# Altium PCB honda_nidec_giraffe20_inverted.pcbdoc
Units mil, origin at the board's own origin, x right, y up, seen from the top; angles counter-clockwise.
Board outline 4959.99 x 2260 mil, 2 copper layers (Top Layer, Bottom Layer); 6 components, 21 nets, 86 pads, 44 vias.
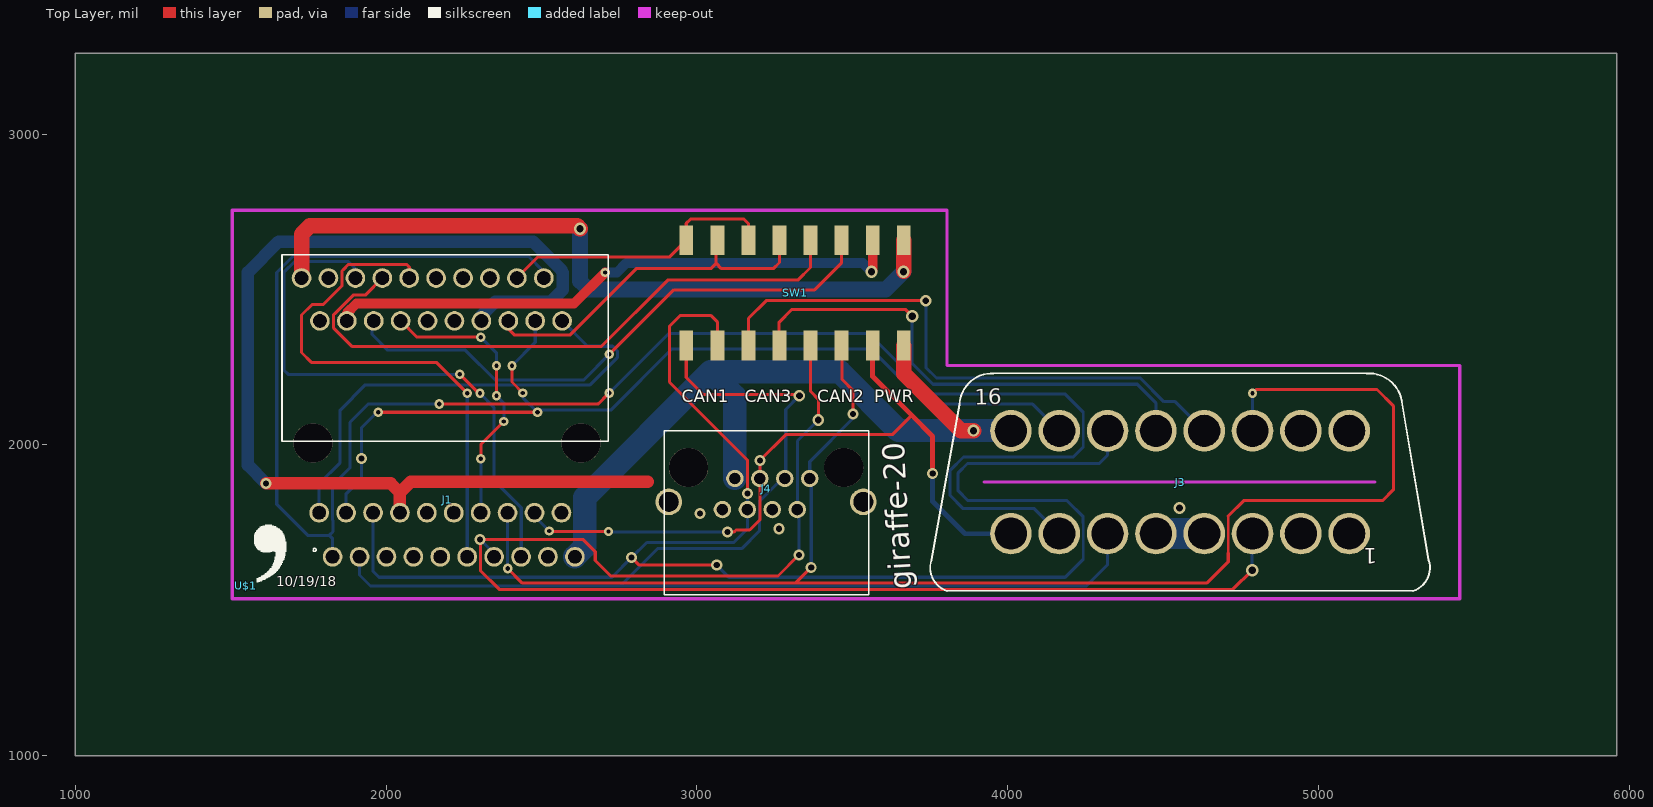
[diagram p0: Top Layer view]
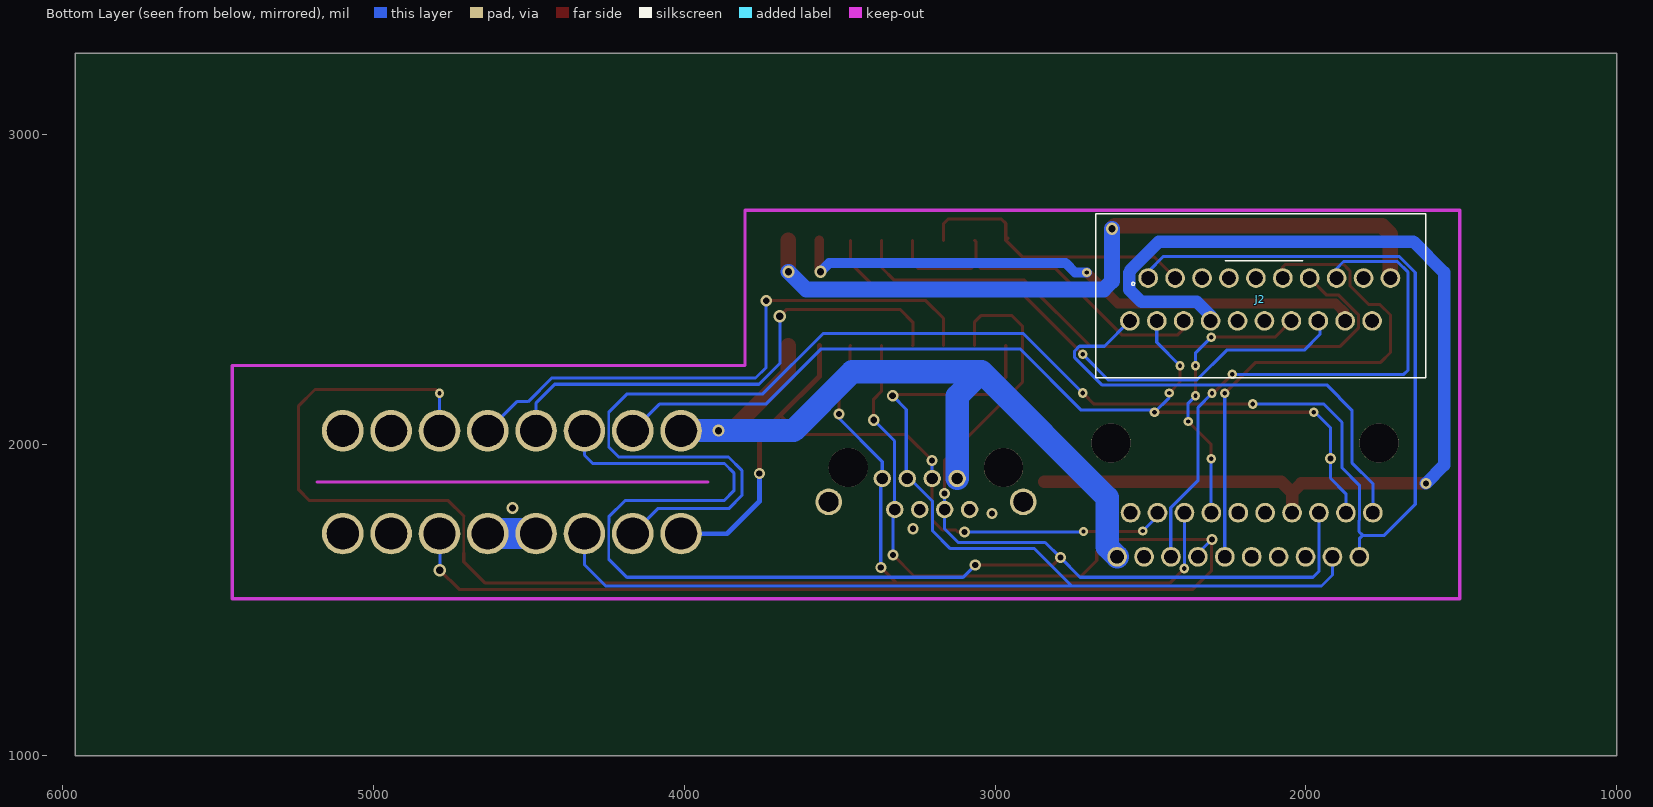
[diagram p1: Bottom Layer view, seen from below]

## Layer stack, top to bottom
Top Layer: signal copper (thickness not stored)
Dielectric: dielectric 12.6, FR-4, Dk 4.8
Bottom Layer: signal copper (thickness not stored)

## Board outline
5959.99,1000 1000,1000 1000,3260 5959.99,3260

## Components (designator, comment, footprint, x,y, rotation, side; value= is the part's Value field where it differs from the comment)
J1 "_" 2X10(RA) 2215,1712 r180 top
J2 "_" 2X10(JAE_FEMALE) 2165,2468 r180 bottom
J3 "OBDII-FEMALE-CUT" OBDII-FEMALE-MIDCUT 4554.99,1880 r0 top
J4 "VERT_RJ45" GLX-S-88M 3226.26,1730 r0 top
SW1 "4XDPSTSMT" 4-DPST 3316.02,2489 r0 top
U$1 "_" LOGO 1549,1546 r0 top

## Footprints (in the part's own frame and the unit in brackets; to place one, negate y for a bottom-side part, rotate by r counter-clockwise, add the part's x,y. Pads: shape width x height; smd on the part's side, far side on the other; paste and mask are expansions set on the pad)
2X10(JAE_FEMALE) [mm]
  round 1.608 hole 1.1 slot 1.1 at 0 deg: 1(-8.7,1.75) 2(-6.5,1.75) 3(-4.3,1.75) 4(-2.1,1.75) 5(0.1,1.75) 6(2.3,1.75) 7(4.5,1.75) 8(6.7,1.75) 9(8.9,1.75) 10(11.1,1.75) 11(-10.2,-1.75) 12(-8,-1.75) 13(-5.8,-1.75) 14(-3.6,-1.75) 15(-1.4,-1.75) 16(0.8,-1.75) 17(3,-1.75) 18(5.2,-1.75) 19(7.4,-1.75) 20(9.6,-1.75)
  silkscreen extent -13,-6.4 14,7
2X10(RA) [mm]
  round 1.608 hole 1.1 slot 1.1 at 0 deg: 1(9.83,1.83) 2(7.63,1.83) 3(5.43,1.83) 4(3.23,1.83) 5(1.03,1.83) 6(-1.17,1.83) 7(-3.37,1.83) 8(-5.57,1.83) 9(-7.77,1.83) 10(-9.97,1.83) 11(10.93,-1.77) 12(8.73,-1.77) 13(6.53,-1.77) 14(4.33,-1.77) 15(2.13,-1.77) 16(-0.07,-1.77) 17(-2.27,-1.77) 18(-4.47,-1.77) 19(-6.67,-1.77) 20(-8.87,-1.77)
  round 3.2 hole 3.2 unplated: ""(-10.47,-7.47) ""(11.43,-7.47)
  silkscreen extent -12.7,-22.86 13.97,1.4
4-DPST [mil]
  rect 44.48x96.06 smd: 1(-350,-169.29) 2(-250,-169.29) 3(-150,-169.29) 4(-50,-169.29) 5(50,-169.29) 6(150,-169.29) 7(250,-169.29) 8(350,-169.29) 9(350,169.29) 10(250,169.29) 11(150,169.29) 12(50,169.29) 13(-50,169.29) 14(-150,169.29) 15(-250,169.29) 16(-350,169.29)
GLX-S-88M [mil]
  round 56 hole 35.44 slot 35.45 at 0 deg: 1(-144.1,61.81) 2(-103.94,161.81) 3(-63.78,61.81) 4(-23.63,161.81) 5(16.53,61.81) 6(56.69,161.81) 7(96.85,61.81) 8(137,161.81)
  round 86 hole 63: S1(-316.54,86.61) S2(309.44,86.61)
  round 125.98 hole 125.98 unplated: ""(-253.55,196.85) ""(246.45,196.85)
  silkscreen extent -331,-213 327,315
LOGO [mil]
  silkscreen extent 26,12 129,196
OBDII-FEMALE-MIDCUT [mm]
  round 3.4 hole 2.6 slot 2.605 at 0 deg: 1(13.825,-4.2) 2(9.875,-4.2) 3(5.925,-4.2) 4(1.975,-4.2) 5(-1.975,-4.2) 6(-5.925,-4.2) 7(-9.875,-4.2) 8(-13.825,-4.2) 9(13.825,4.2) 10(9.875,4.2) 11(5.925,4.2) 12(1.975,4.2) 13(-1.975,4.2) 14(-5.925,4.2) 15(-9.875,4.2) 16(-13.825,4.2)
  silkscreen extent -20.42,-8.89 20.42,8.89

## Via types
v1: diameter 29.78, hole 13.78, Top Layer to Bottom Layer, 16 vias
v2: diameter 35.69, hole 19.68, Top Layer to Bottom Layer, 14 vias
v3: diameter 39.62, hole 23.62, Top Layer to Bottom Layer, 7 vias
v4: diameter 37.65, hole 21.66, Top Layer to Bottom Layer, 3 vias
v5: diameter 31.75, hole 15.74, Top Layer to Bottom Layer, 3 vias
v6: diameter 31, hole 15, Top Layer to Bottom Layer, 1 vias

## Nets (pads, with @x,y where several pads share a name; then routed paths per layer and width w, separated by ;. In a path a pad name is that pad's centre, name@x,y a point inside that pad or via, vN(x,y) a via of type N, cw(c..) or ccw(c..) an arc to the next point about the centre after c; other vN are vias at no path point)
12VIN: J1.10 J3.16 J4.2 SW1.8 | length 2587.4
  Top Layer w50: SW1.8 3666.02,2229.44 3849.46,2046 v3(3890.46,2046)
  Bottom Layer w75: J1.10 2639.36,1671.8 2639.36,1830.37 3044,2235 ; J4.2 3122.32,2156.68 3044,2235 ; J3.16 4010.06,2046 v3(3890.46,2046) 3649,2046 3460,2235 3044,2235
12VIN': J2.10 SW1.9 | length 2398.5
  Top Layer w32: v3(3665,2557) v3@3666.02,2558.02
  Top Layer w50: J2.10 1727.99,2677.99 1755,2705 2615,2705 v3(2624,2696) ; v3@3666.02,2558.02 SW1.9
  Bottom Layer w50: v3(2624,2696) 2624,2527 2651,2500 3608,2500 v3(3665,2557)
CAN1_H: J1.2 J3.6 J4.6 SW1.1 | length 4125.9
  Top Layer w10: SW1.1 2966.02,2216.97 3021,2162 3326,2162 v4(3330,2158)
  Bottom Layer w10: J1.2 1914.61,1581.39 1950,1546 2753.29,1546 ; 2949,1666 2955,1666 ; 3286,2028 3286,2022.36 ; v4(3330,2158) 3286,2114 3286,2022.36 ; J3.6 4321.99,1714.38 4321.99,1615 4252.99,1546 2753.29,1546 ; 2753.29,1546 2873.29,1666 2955,1666 ; 2955,1666 3144,1666 3201.48,1723.48 3201.48,1818.48 3274.81,1891.81 J4.6 3286,1894.86 3286,2022.36
CAN1_H': J2.2 SW1.14 SW1.16 | length 925.3
  Top Layer w10: J2.2 2489.01,2605 2912.73,2605 SW1.16 ; SW1.16@2959.31,2665 SW1.16 ; SW1.14 3166.02,2711.97 3151,2727 2980,2727 2966,2713 SW1.16
CAN1_L: J1.13 J3.14 J4.3 SW1.2 | length 5194.3
  Top Layer w10: v2(2790,1638) 2815,1613 v2(3064,1613) ; SW1.2 3066.02,2395.97 3046,2416 2946,2416 2912,2382 2912,2202 3163,1951 v2(3163,1843)
  Bottom Layer w8: 4242.99,1632 4242.99,1682.63 4243.14,1682.78 4243.14,1746.51 ; 4242.99,1746.66 4243.14,1746.51 ; 4242.99,1748.07 4243.14,1747.92 4243.14,1746.51
  Bottom Layer w10: J1.13 1957.91,1593.09 1977,1574 2727,1574 v2@2791,1638 ; v2(2790,1638) v2@2791,1638 ; v2(3064,1613) 3103,1574 4184.99,1574 4242.99,1632 ; v2(3163,1843) 3163,1792.33 J4.3 3163,1791.29 3163,1730 3119,1686 2839,1686 v2@2791,1638 ; 4242.99,1748.07 4242.99,1769 4191.34,1820.65 3905,1820.65 3900.41,1820.65 3872.35,1820.65 3841,1852 3841,1910 3871,1940 4294.87,1940 4321.73,1966.85 J3.14
CAN1_L': J2.13 SW1.13 SW1.15 | length 1164.9
  Top Layer w10: J2.13 2393.34,2373.65 2414,2353 2591,2353 2805,2567 3045,2567 3062,2584 ; SW1.15 3062,2654.27 3062,2584 ; SW1.13 3266.02,2587.02 3246,2567 3079,2567 3062,2584
CAN2_H: J1.7 J3.3 J4.7 SW1.5 | length 4665.6
  Top Layer w10: v2(3329,1646) 3261,1578 2723,1578 2673,1628 2673,1656 2633,1696 v2(2302,1696) 2304,1694 2304,1595 2364,1535 4724.99,1535 v3(4786.99,1597) ; SW1.5 3366.02,2171.98 3391,2147 v4(3391,2080)
  Bottom Layer w10: v2(2302,1696) 2347.68,1650.32 J1.7 ; v2(3329,1646) 3329,1785.92 J4.7 3324,1792.7 3324,2013 v4(3391,2080) v4@3391,2078 ; v3(4786.99,1597) 4786.99,1713.38 J3.3
CAN2_H': J2.7 SW1.12 | length 2007.9
  Top Layer w9: 1832,2375 1830.68,2376.32 1830.68,2418.86 1835.91,2424.09
  Top Layer w10: 1831.01,2419.19 1835.91,2424.09 1893.82,2482 1932.94,2482 J2.7 ; 1832,2375 1890,2317 2693,2317 2906,2530 3325,2530 3366,2571 SW1.12
CAN2_L: J1.18 J3.11 J4.8 SW1.6 | length 4989
  Top Layer w8: 4709.99,1652 4709.99,1771
  Top Layer w10: v6(2391,1602) 2437,1556 3318,1556 ; v2(3368,1606) 3318,1556 ; SW1.6 3467,2318.73 3467,2211 3502,2176 v2(3502,2099) ; 4709.99,1652 4709.99,1624 4641.99,1556 3318,1556 ; 4709.99,1771 4759.64,1820.65 5206.58,1820.65 5241.34,1855.42 5241.34,2106 5241.34,2120.35 5241.34,2125.65 5188.99,2178 4799.99,2178 v1(4787.99,2166)
  Bottom Layer w10: v6(2391,1602) J1.18 ; v2(3368,1606) 3368,1887.08 J4.8 3363.26,1946.27 3502,2085 v2(3502,2099) ; v1(4787.99,2166) 4787.99,2045.62 J3.11
CAN2_L': J2.18 SW1.11 | length 1845.8
  Top Layer w10: v1(2718.5,2291.5) 2926,2499 3379,2499 3465,2585 SW1.11
  Bottom Layer w10: J2.18 1955,2393.82 1955,2355 2005,2305 2255,2305 2351,2209 2636,2209 v1(2718.5,2291.5)
CAN3_H: J3.12 SW1.3 | length 1877.4
  Top Layer w10: SW1.3 3166,2407 3223,2464 v4(3737,2464)
  Bottom Layer w10: v4(3737,2464) 3737,2249 3771,2215 4426.99,2215 4502.99,2139 4539.1,2139 J3.12 J3.12@4632.99,2045.6
CAN3_L: J3.13 SW1.4 | length 1608.4
  Top Layer w10: SW1.4 3265,2320.73 3265,2395 3306,2436 3671,2436 v3(3693,2414)
  Bottom Layer w10: v3(3693,2414) 3693,2262 3760,2195 4417.37,2195 4476.99,2135.38 4476.99,2045.6 J3.13
GND: J1.14 J2.14 J3.4 J3.5 J4.1 J4.5 | length 3644.1
  Top Layer w40: v2(1614,1876) 2015.05,1876 2044.53,1846.53 ; J1.14 2044.53,1846.53 ; 2842,1881 2079,1881 2044.53,1846.53
  Bottom Layer w40: v2(1614,1876) 1555,1935 1555,2555 1654,2654 2473.12,2654 2566,2561.12 2566,2555.46 2568,2553.46 2568,2499 2529,2460 2351,2460 2306.73,2415.73 J2.14
  Bottom Layer w100: J3.5 J3.4
  other v2: 3264,1730 3010,1779
  other v3: 4552.99,1797
IGN: J1.19 J3.8 J4.4 SW1.7 | length 2447.9
  Top Layer w10: v1(2525,1723) 2527,1721 v1(2716,1721) ; v2(3099,1720) 3120,1720 3126,1726 3170,1726 3203,1759 v2(3203,1950) 3286,2033 3629.19,2033 3691.09,2094.9
  Top Layer w16: SW1.7 3566.02,2219.97 3691.09,2094.9 3759,2027 v2(3759,1908)
  Bottom Layer w10: J1.19 2477.6,1770.4 v1(2525,1723) ; v1(2716,1721) 2717,1720 v2(3099,1720) ; J4.4 3202.63,1949.64 v2(3203,1950)
  Bottom Layer w16: v2(3759,1908) 3759,1818 3863,1714 4010.06,1714 J3.8
IGN': J2.19 SW1.10 | length 1894.3
  Top Layer w32: J2.19 1873.66,2423.66 1905,2455 2605,2455 v1(2705,2555) ; v3(3562,2557) 3566.02,2561.02 SW1.10
  Bottom Layer w32: v1(2705,2555) 2743,2555 2773,2585 3534,2585 v3(3562,2557)
K_LIN: J1.1 J2.1 J3.7 | length 5979.5
  Top Layer w10: v5(2171,2132) 2683,2132 2690,2139 2705.5,2154.5 v5(2718,2167)
  Bottom Layer w8: 4242.99,2105 4242.99,2077.37 4243.14,2077.22 4243.14,1992.97
  Bottom Layer w9: 1827.99,1799.87 1827.99,1758.01 1829,1757
  Bottom Layer w10: J1.1 1827.99,1698.01 1817,1709 ; 1827.99,1799.87 1827.99,1869.99 1884,1926 1884,2072.51 1943.49,2132 v5(2171,2132) ; 1829,1757 1829,1721 1817,1709 ; J2.1 2507.52,2557.48 2459,2606 1699.37,2606 1648,2554.63 1648,1809 1748,1709 1817,1709 ; v5(2718,2167) 2909,2358 3554,2358 3748,2164 4183.99,2164 4242.99,2105 ; J3.7 4085.86,1795 3857,1795 3815,1837 3815,1918 3858,1961 4211.17,1961 4243.14,1992.97
L_LIN: J1.12 J2.12 J3.15 | length 3112.7
  Top Layer w10: v1(1975,2105) v5(2487,2105) ; v1(2405,2255) 2405,2202.11 v1(2440,2167.11)
  Bottom Layer w10: J1.12 1871.3,1843.3 1921,1893 v2(1921,1956) 1921,2055 1971,2105 v1(1975,2105) ; v1(2405,2255) 2479.96,2329.96 J2.12 ; v1(2440,2167.11) 2440,2152 v5(2487,2105) 2494,2112 2723,2112 2920,2309 3560,2309 3738,2131 4080.57,2131 J3.15
LDW_IND: J1.11 J2.11 | length 1559.9
  Bottom Layer w10: J1.11 1784.68,1875.68 1852,1943 1852,2112 1933,2193 2656.61,2193 2744.39,2280.77 2744.39,2302.22 2729.22,2317.39 2648.29,2317.39 J2.11
LDW_SW: J1.8 J2.8 | length 1844.3
  Top Layer w10: v1(2237,2227) 2298.11,2165.89 v1(2302,2165.89)
  Bottom Layer w10: J2.8 1901.22,2567.78 1879,2590 1706,2590 1671,2555 1671,2241 1685,2227 v1(2237,2227) ; v1@2304.11,2165.89 v1(2302,2165.89) 2347,2120.89 2347,1886 2434.94,1798.05 2434.94,1640.61 J1.8
MDX_CANH: J1.6 J2.6 | length 1714.9
  Top Layer w9: 1857.91,2518.71 1857.91,2559.91 1862,2564
  Top Layer w10: 1857.91,2518.71 1857.91,2511.91 1798,2452 1762,2452 1728,2418 1728,2297.22 1759.61,2265.61 2161.39,2265.61 v1(2261,2166) ; 1862,2564 1878.38,2580.38 2005,2580.38 2005.84,2580.38 2066.62,2580.38 2074.45,2572.55 J2.6
  Bottom Layer w10: v1(2261,2166) 2261.06,2165.94 J1.6
MDX_CANL: J1.17 J2.17 | length 906.3
  Top Layer w10: J2.17 2099.43,2346.56 v1(2305,2346.56) ; v1(2305,1955) 2305,2001 v1(2379,2075) ; v1(2355,2157.89) v1(2355,2255)
  Bottom Layer w10: J1.17 2305,1782.31 v1(2305,1955) ; v1(2305,2346.56) 2355,2296.56 v1(2355,2255) ; v1(2355,2157.89) 2379,2133.89 v1(2379,2075)
pads on no net: J1. J1.3 J1.4 J1.5 J1.9 J1.15 J1.16 J1.20 J2.3 J2.4 J2.5 J2.9 J2.15 J2.16 J2.20 J3.1 J3.2 J3.9 J3.10 J4. J4.S1 J4.S2

## Polygon pours and split planes (outlines as drawn)
GND on Bottom Layer (solid): 1503,2757 3805,2757 3805,2253 5453.99,2253 5453.99,1505 1503,1505
GND on Top Layer (solid): 1505,2755 1505,1505 5454.99,1505 5454.99,2255 3805,2255 3805,2755

## Silkscreen, mask and mechanical layers (free items; w line width, h text height)
Top Overlay:
  text "CAN1" at 2951,2137 h40
  text "CAN3" at 3154,2137 h40
  text "CAN2" at 3387,2137 h40
  text "PWR" at 3571,2137 h40
  text "10/19/18" at 1646.6,1545 h32
  text "giraffe-20" at 3690.95,1537.83 h70 r93
Document:
  region: 3316,1530 3316,1512 3347,1512 3347,1530
  lines w10: 3114,2119 3114,2191 ; 3365,2122 3365,2194 ; 3538,2125 3538,2197 ; 3704,2122 3704,2194 ; 3316,1512 3316,1530 3347,1530 3347,1512 3316,1512
  text "*compatible with freeTheC pins soldered on TOP" at 4197.59,2296 h16

## Text inside footprints (layer, text, board x,y; h text height)
J3: Top Overlay "1" at 5189.99,1666.97 h50 r180; Top Overlay "16" at 3894.21,2129.41 h50 r1